# Altium PCB top.PcbDoc
Units mm, origin at the board's own origin, x right, y up, seen from the top; angles counter-clockwise.
Board outline 89.99 x 89.99 mm, 2 copper layers (Top Layer, Bottom Layer); 6 components, 4 nets, 48 pads, 6 vias.
Unrouted connection lines stored in the file: 11.
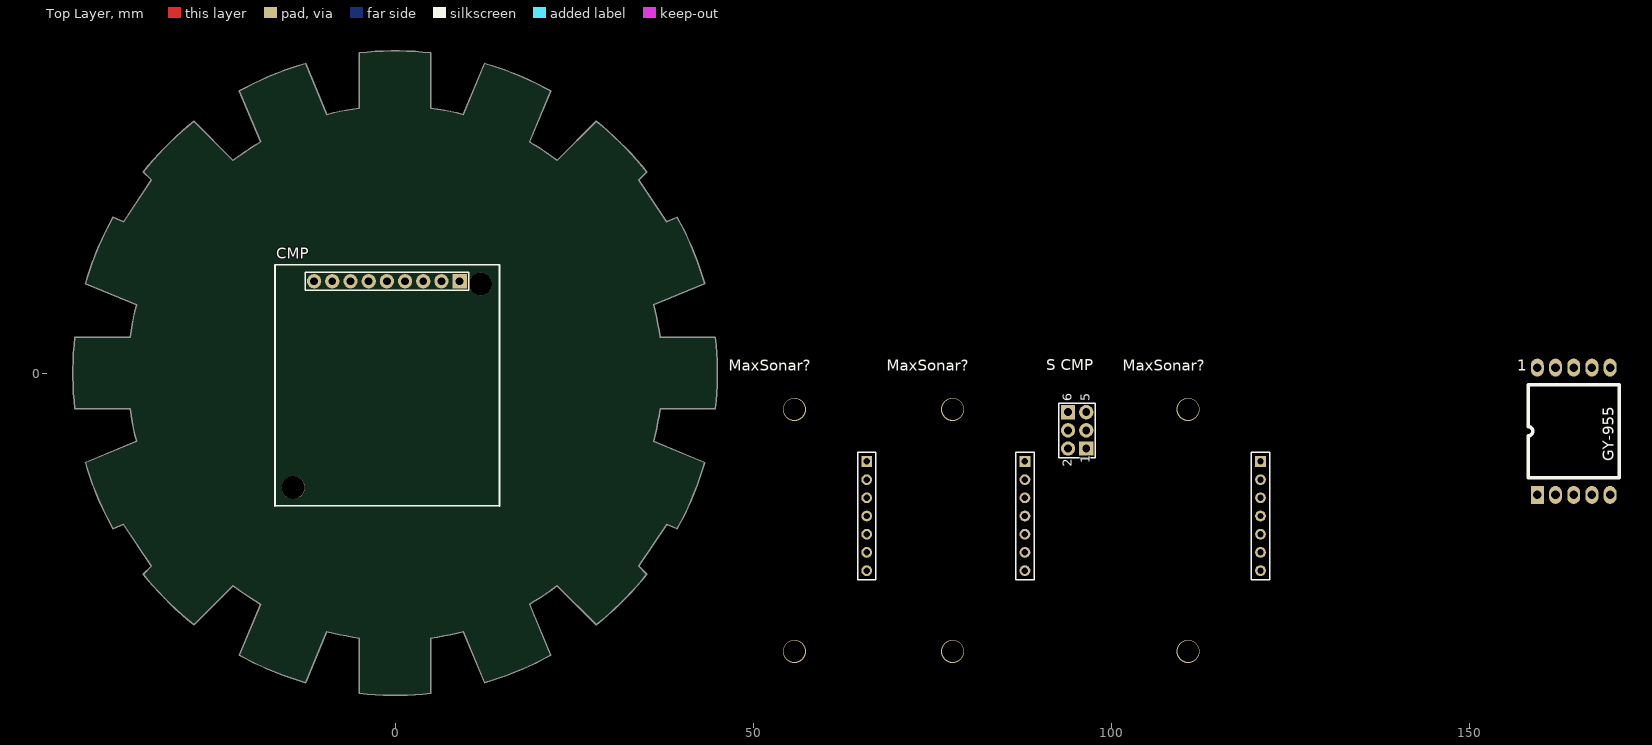
[diagram p0: Top Layer view]
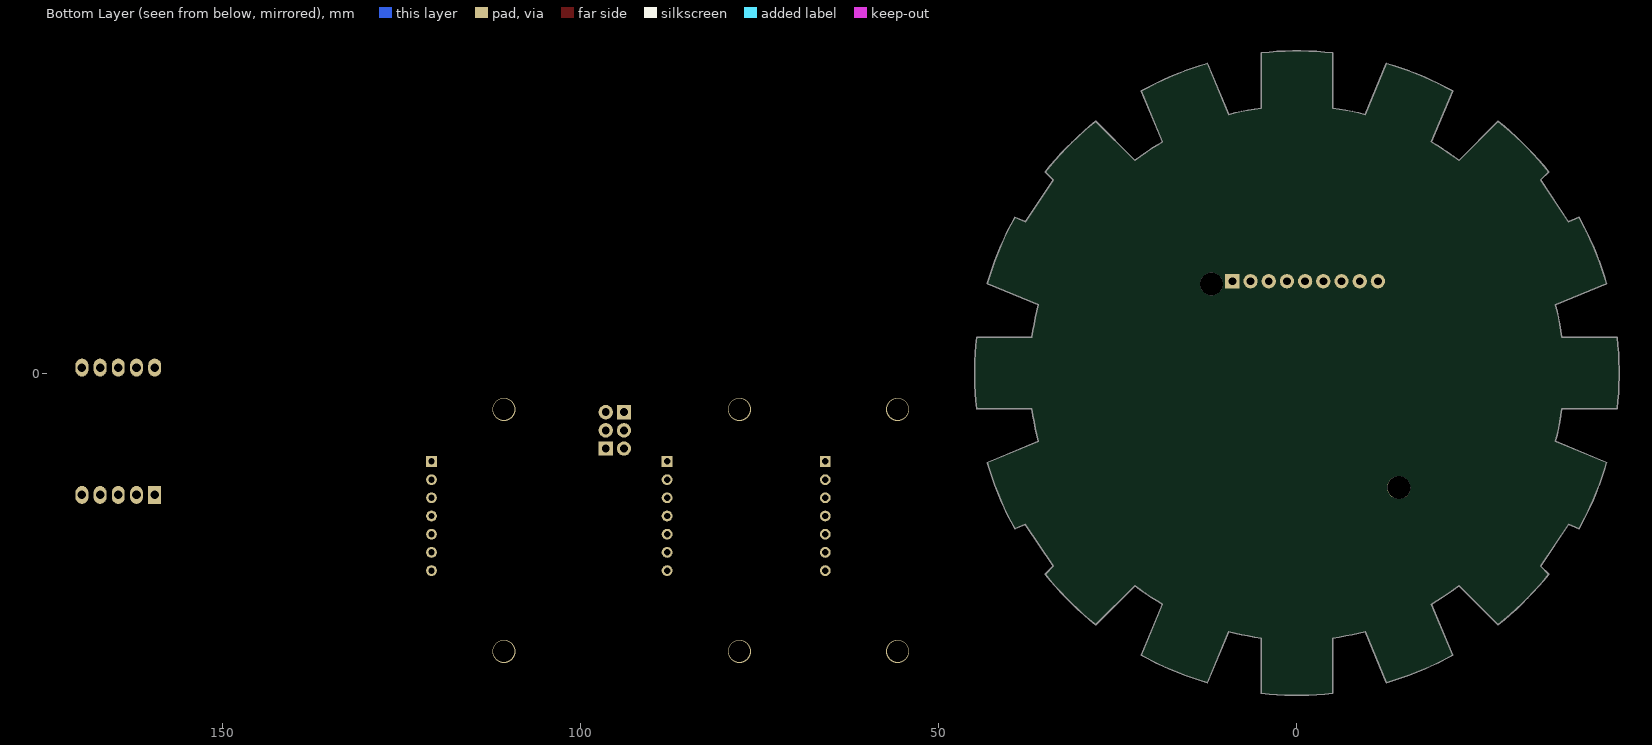
[diagram p1: Bottom Layer view, seen from below]

## Layer stack, top to bottom
Top Solder: solder mask 0.0102, Solder Resist, Dk 3.5
Top Layer: signal copper 0.0356
Dielectric 1: dielectric 0.32, FR-4, Dk 4.8
Bottom Layer: signal copper 0.0356
Bottom Solder: solder mask 0.0102, Solder Resist, Dk 3.5

## Board outline
-34.024,-26.953 -37.922,-21.12 -39.404,-21.734 cw(c0,0) -43.231,-12.495 -36.097,-9.54 cw(c0,0) -37,-5 -44.721,-5 cw(c0,0) -44.721,5 -37,5 cw(c0,0) -36.097,9.54 -43.231,12.495 cw(c0,0) -39.404,21.734 -37.922,21.12 -34.024,26.953 -35.158,28.087 cw(c0,0) -28.087,35.158 -22.627,29.698 cw(c0,0) -18.779,32.27 -21.734,39.404 cw(c0,0) -12.495,43.231 -9.54,36.097 cw(c0,0) -5,37 -5,44.721 cw(c0,0) 5,44.721 5,37 cw(c0,0) 9.54,36.097 12.495,43.231 cw(c0,0) 21.734,39.404 18.779,32.27 cw(c0,0) 22.627,29.698 28.087,35.158 cw(c0,0) 35.158,28.087 34.024,26.953 37.922,21.12 39.404,21.734 cw(c0,0) 43.231,12.495 36.097,9.54 cw(c0,0) 37,5 44.721,5 cw(c0,0) 44.721,-5 37,-5 cw(c0,0) 36.097,-9.54 43.231,-12.495 cw(c0,0) 39.404,-21.734 37.922,-21.12 34.024,-26.953 35.158,-28.087 cw(c0,0) 28.087,-35.158 22.627,-29.698 cw(c0,0) 18.779,-32.27 21.734,-39.404 cw(c0,0) 12.495,-43.231 9.54,-36.097 cw(c0,0) 5,-37 5,-44.721 cw(c0,0) -5,-44.721 -5,-37 cw(c0,0) -9.54,-36.097 -12.495,-43.231 cw(c0,0) -21.734,-39.404 -18.779,-32.27 cw(c0,0) -22.627,-29.698 -28.087,-35.158 cw(c0,0) -35.158,-28.087

## Design rules (kind name [scope] priority, off if disabled: settings)
Clearance [All] p1: gap=0.254 ignorepadtopadclearanceinfootprint=FALSE except(0: Arc-Hole Track-Hole SMDPad-Hole THPad-Hole Via-Hole Fill-Hole Poly-Hole Region-Hole Text-Hole)
PolygonConnect [All] p1: connectstyle=Relief reliefconductorwidth=0.254 reliefentries=4 polygonreliefangle="90 Angle" airgapwidth=0.254
RoomDefinition top [InComponentClass('top')] p1: confinementstyle=ConfineIn formatcopy=TRUE lockcomponents=FALSE outline 46.101,-43.561 171.323,-43.561 171.323,2.413 46.101,2.413
RoutingVias [All] p1: holewidth=0.711 width=1.27 viastyle="Through Hole" minholewidth=0.711 minwidth=1.27 maxholewidth=0.711 maxwidth=1.27
SolderMaskExpansion [All] p1: expansion=0.102
Width [All] p1: maxlimit=0.254 minlimit=0.254 preferedwidth=0.254
30 further rules are at their usual default settings.

## Classes and differential pairs
component class top: 1 CMP MaxSonar? "S CMP"

## Components (designator, comment, footprint, x,y, rotation, side; value= is the part's Value field where it differs from the comment)
1 "1" DIP10 159.512,-17.018 r90 top
CMP "CMP03" CMP03 -0.635,-2.413 r0 top
MaxSonar? "Ultrasonic" MaxSonar 113.665,-19.939 r0 top
MaxSonar? "Ultrasonic" MaxSonar 58.674,-19.939 r0 top
MaxSonar? "Ultrasonic" MaxSonar 80.772,-19.939 r0 top
"S CMP" "IDC 2X3" "IDC 2X3" 95.25,-8.001 r90 top

## Footprints (in the part's own frame and the unit in brackets; to place one, negate y for a bottom-side part, rotate by r counter-clockwise, add the part's x,y. Pads: shape width x height; smd on the part's side, far side on the other; paste and mask are expansions set on the pad)
CMP03 [mm]
  round 3.2 hole 3.2: 0(-13.589,-13.589) 0(12.573,14.859)
  rect 2x2 hole 1.1: 1(9.652,15.24)
  round 2 hole 1.1: 2(7.112,15.24) 3(4.572,15.24) 4(2.032,15.24) 5(-0.508,15.24) 6(-3.048,15.24) 7(-5.588,15.24) 8(-8.128,15.24) 9(-10.668,15.24)
  silkscreen extent -16.13,-16.13 15.24,17.53
DIP10 [mm]
  rect 2.5x1.8 hole 1.2: 1(0,0)
  oval 2.5x1.8 hole 1.2: 2(0,-2.54) 3(0,-5.08) 4(0,-7.62) 5(0,-10.16) 6(17.78,-10.16) 7(17.78,-7.62) 8(17.78,-5.08) 9(17.78,-2.54) 10(17.78,0)
  silkscreen extent 2.38,-11.43 15.4,1.27
"IDC 2X3" [mm]
  rect 2x2 hole 1.1: 1(-2.54,-1.27) 6(2.54,1.27)
  round 2 hole 1.1: 2(-2.54,1.27) 3(0,-1.27) 4(0,1.27) 5(2.54,-1.27)
  silkscreen extent -3.81,-2.54 3.81,2.54, body extent -7.62,-4.86 7.62,4.59, height 9.1
MaxSonar [mm] "HighPerformance UltraSonic Range Finder"
  rect 1.5x1.5 hole 0.9: 1(7.188,7.595)
  round 1.5 hole 0.9: 2(7.188,5.055) 3(7.188,2.515) 4(7.188,-0.025) 5(7.188,-2.565) 6(7.188,-5.105) 7(7.188,-7.645)
  silkscreen extent 5.92,-8.92 8.46,8.86, body extent -12.32,-23.48 7.55,19.52, height 21.5

## Part data
1: library part Component_1
MaxSonar? MaxSonar? MaxSonar?: library part MaxSonar

## Via types
v1: diameter 3.2, hole 3, Top Layer to Bottom Layer, 6 vias

## Nets (pads, with @x,y where several pads share a name; then routed paths per layer and width w, separated by ;. In a path a pad name is that pad's centre, name@x,y a point inside that pad or via, vN(x,y) a via of type N, cw(c..) or ccw(c..) an arc to the next point about the centre after c; other vN are vias at no path point)
GND: 1.3 1.7 "S CMP.3" "S CMP.4" CMP.9
SCL: 1.1 "S CMP.6" CMP.2
SDA: 1.2 "S CMP.5" CMP.3
VCC: 1.10 "S CMP.1" "S CMP.2" CMP.1
pads on no net: 1.4 1.5 1.6 1.8 1.9 CMP.0 CMP.4 CMP.5 CMP.6 CMP.7 CMP.8 MaxSonar?.1 MaxSonar?.2 MaxSonar?.3 MaxSonar?.4 MaxSonar?.5 MaxSonar?.6 MaxSonar?.7
copper on no net:
  other v1: 55.753,-38.862 77.851,-38.862 110.744,-38.862 55.753,-5.08 77.851,-5.08 110.744,-5.08

## Silkscreen, mask and mechanical layers (free items; w line width, h text height)
Mechanical 1:
  circle w0.013: c-33.479,-22.37 r1.5
  circle w0.013: c-33.479,22.37 r1.5
  circle w0.013: c33.479,22.37 r1.5
  circle w0.013: c33.479,-22.37 r1.5
  lines w0.013: -44.721,-5 cw(c0,0) -44.721,5 -37,5 cw(c0,0) -36.097,9.54 -43.231,12.495 cw(c0,0) -39.404,21.734 -37.922,21.12 -34.024,26.953 -35.158,28.087 cw(c0,0) -28.087,35.158 -22.627,29.698 cw(c0,0) -18.779,32.27 -21.734,39.404 cw(c0,0) -12.495,43.231 -9.54,36.097 cw(c0,0) -5,37 -5,44.721 cw(c0,0) 5,44.721 5,37 cw(c0,0) 9.54,36.097 12.495,43.231 cw(c0,0) 21.734,39.404 18.779,32.27 cw(c0,0) 22.627,29.698 28.087,35.158 cw(c0,0) 35.158,28.087 34.024,26.953 37.922,21.12 39.404,21.734 cw(c0,0) 43.231,12.495 36.097,9.54 cw(c0,0) 37,5 44.721,5 cw(c0,0) 44.721,-5 37,-5 cw(c0,0) 36.097,-9.54 43.231,-12.495 cw(c0,0) 39.404,-21.734 37.922,-21.12 34.024,-26.953 35.158,-28.087 cw(c0,0) 28.087,-35.158 22.627,-29.698 cw(c0,0) 18.779,-32.27 21.734,-39.404 cw(c0,0) 12.495,-43.231 9.54,-36.097 cw(c0,0) 5,-37 5,-44.721 cw(c0,0) -5,-44.721 -5,-37 cw(c0,0) -9.54,-36.097 -12.495,-43.231 cw(c0,0) -21.734,-39.404 -18.779,-32.27 cw(c0,0) -22.627,-29.698 -28.087,-35.158 cw(c0,0) -35.158,-28.087 -34.024,-26.953 -37.922,-21.12 -39.404,-21.734 cw(c0,0) -43.231,-12.495 -36.097,-9.54 cw(c0,0) -37,-5 -44.721,-5

## Text inside footprints (layer, text, board x,y; h text height)
1: Top Overlay "GY-955" at 170.18,-12.319 h1.52 r90
MaxSonar?: Mechanical 1 "Gnd" at 119.761,-30.48 h0.5
MaxSonar?: Mechanical 1 "Gnd" at 86.868,-30.48 h0.5
MaxSonar?: Mechanical 1 "Gnd" at 64.77,-30.48 h0.5
"S CMP": Top Overlay "1" at 97.028,-12.573 h1.27 r90; Top Overlay "2" at 94.488,-13.081 h1.27 r90; Top Overlay "5" at 97.028,-3.937 h1.27 r90; Top Overlay "6" at 94.488,-3.937 h1.27 r90